# Altium PCB Synth.PcbDoc
Units mm, origin at the board's own origin, x right, y up, seen from the top; angles counter-clockwise.
Board outline 67.94 x 81.91 mm, 2 copper layers (Top Layer, Bottom Layer); 69 components, 40 nets, 189 pads, 106 vias.
Unrouted connection lines stored in the file: 3.
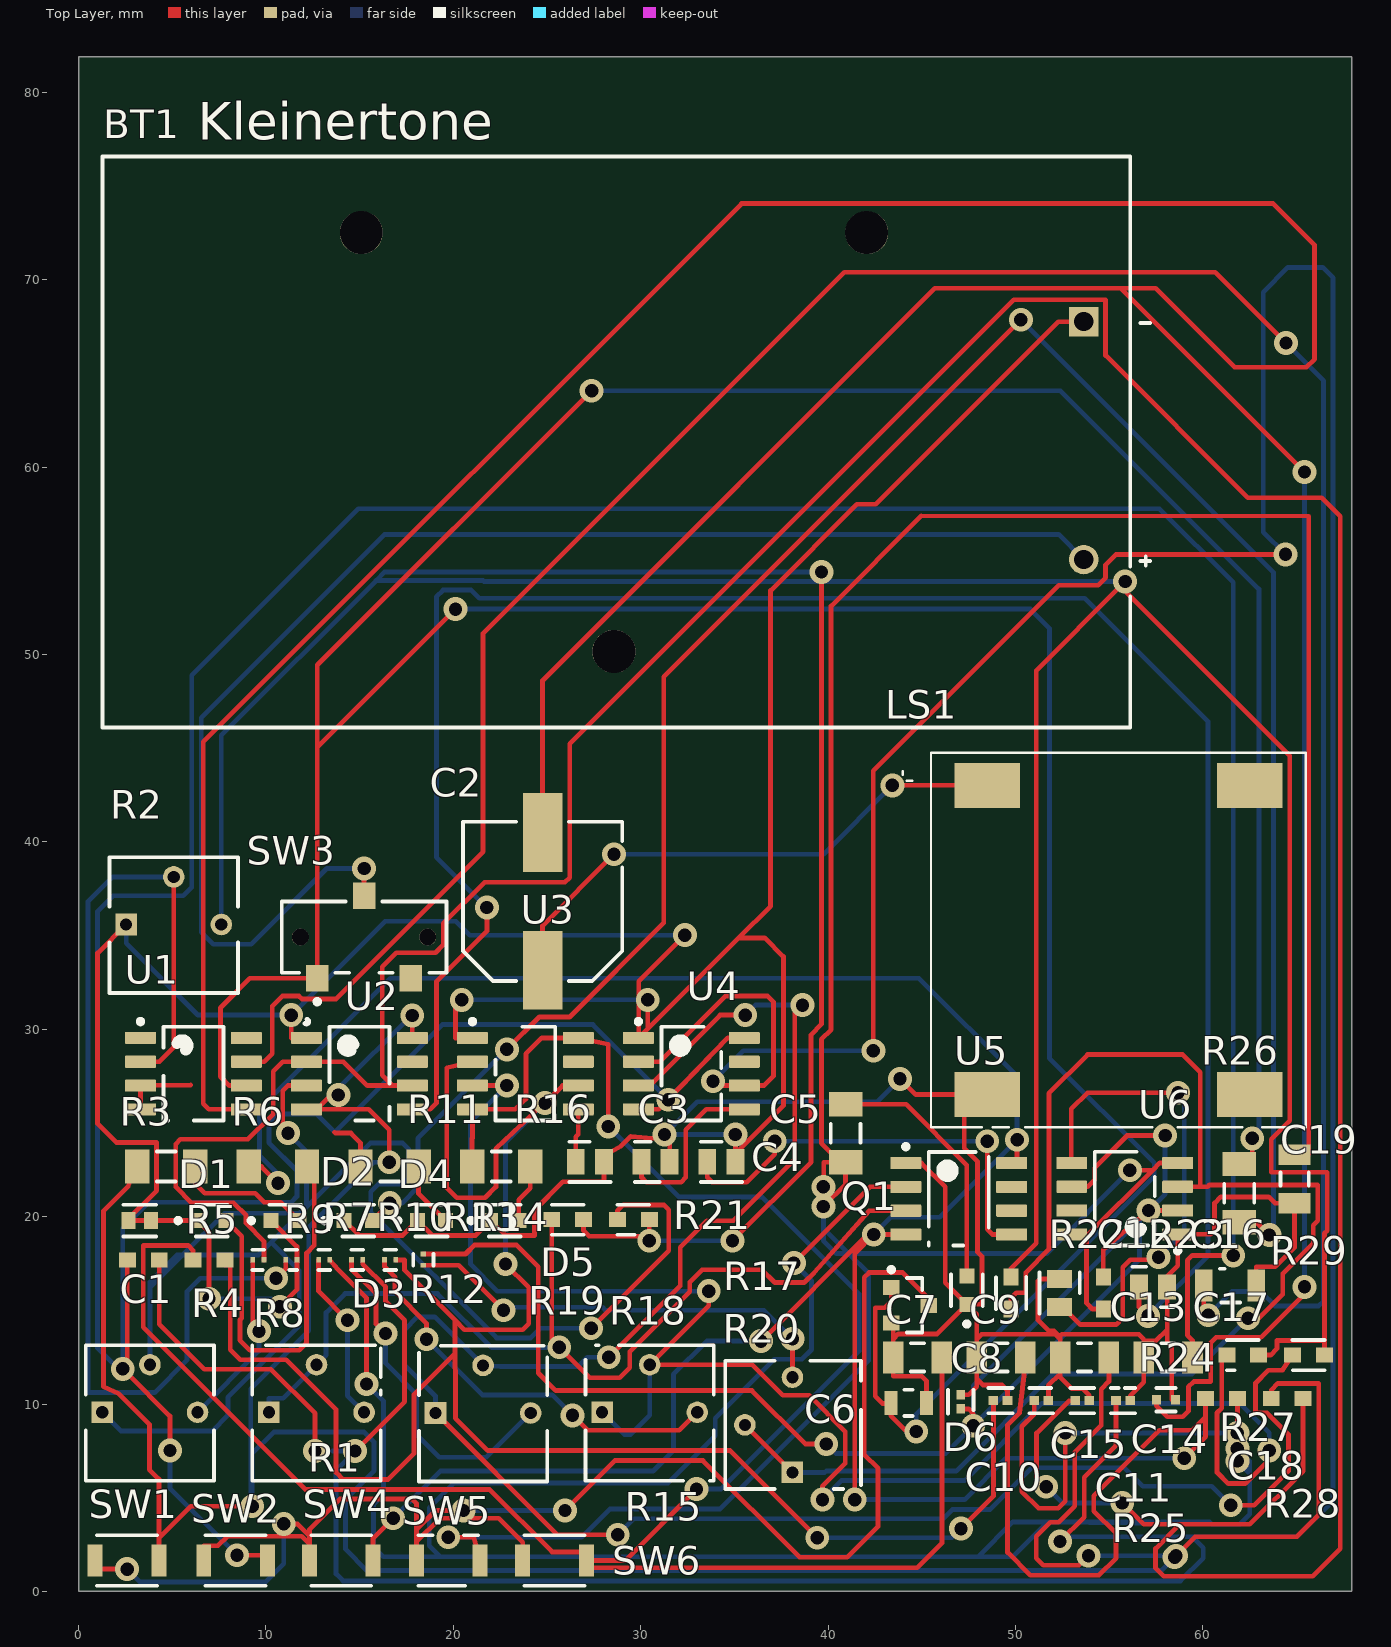
[diagram p0: Top Layer view]
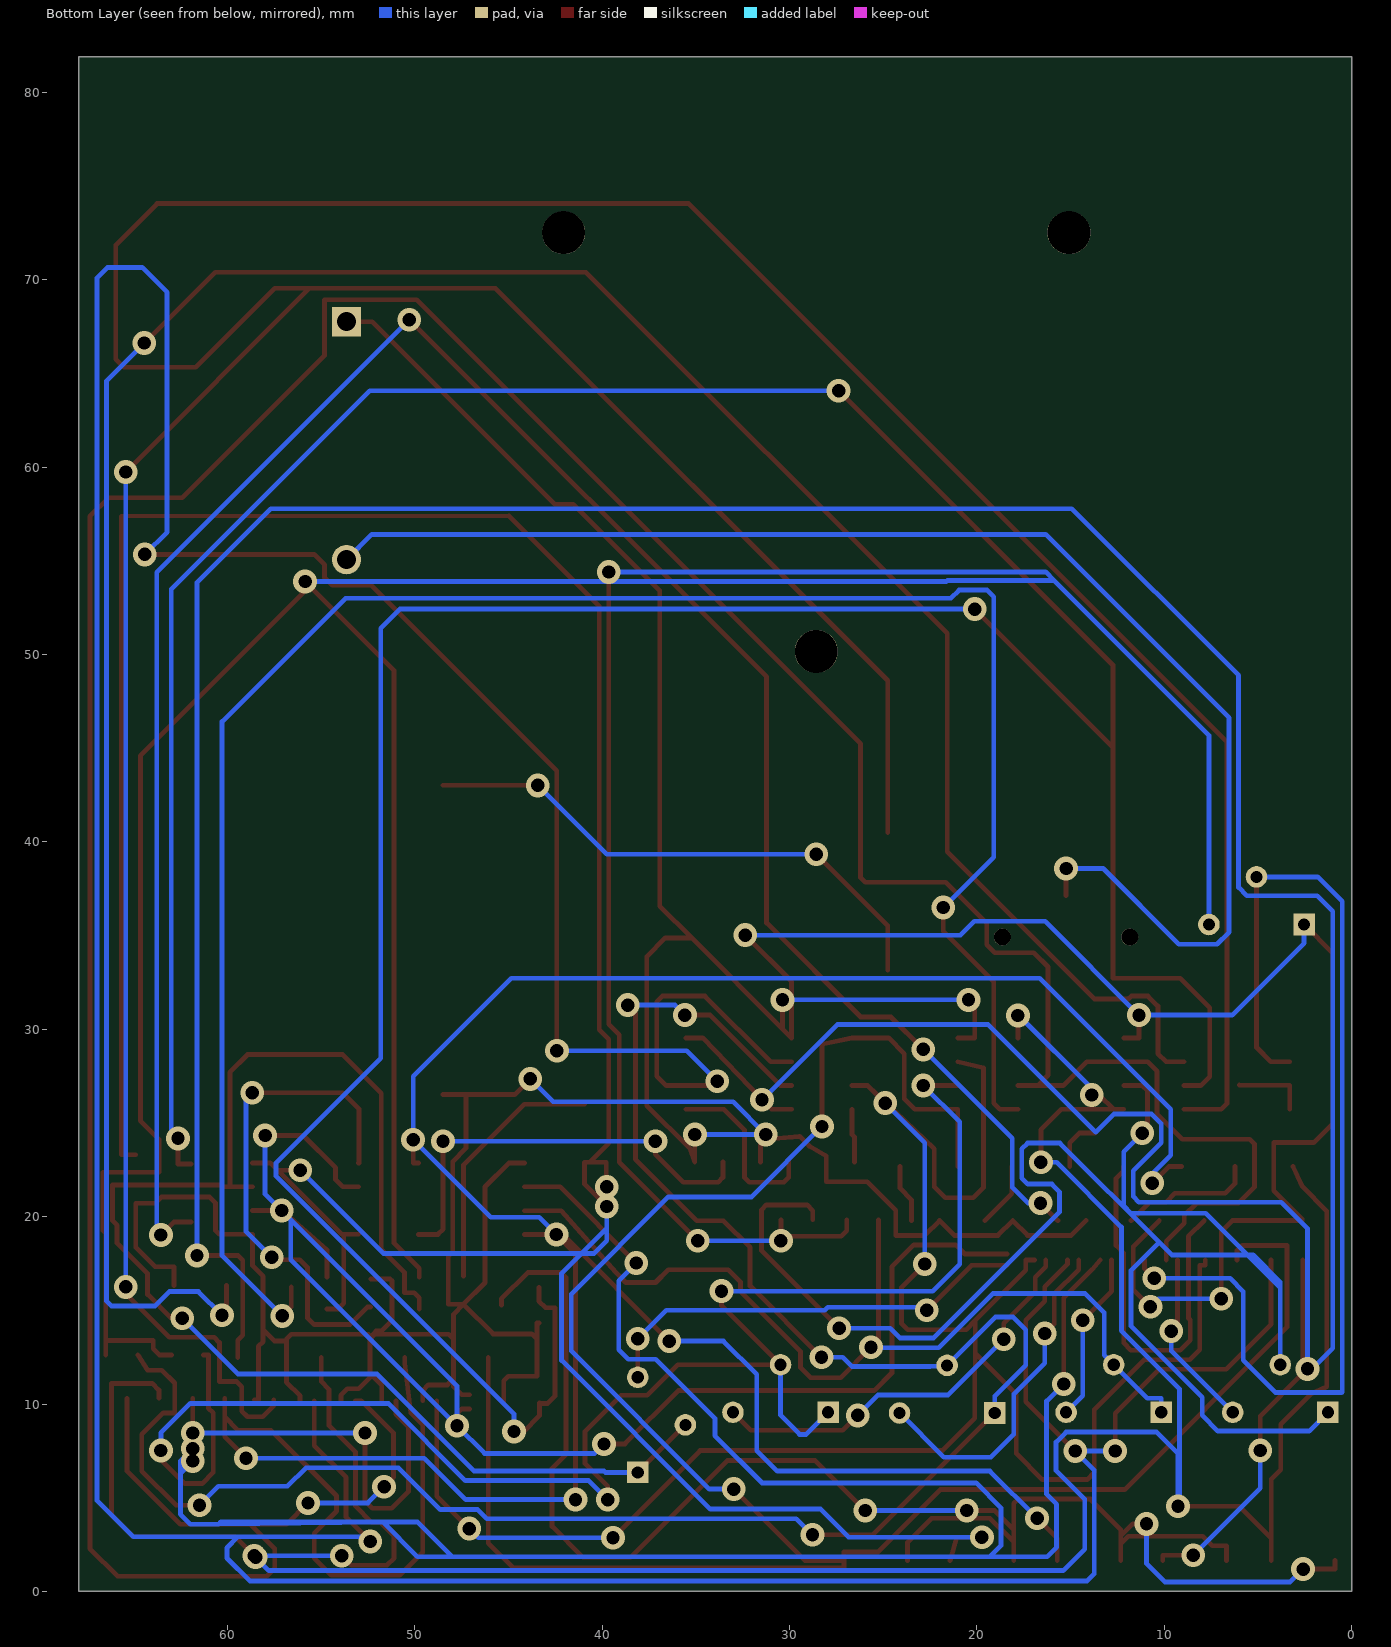
[diagram p1: Bottom Layer view, seen from below]
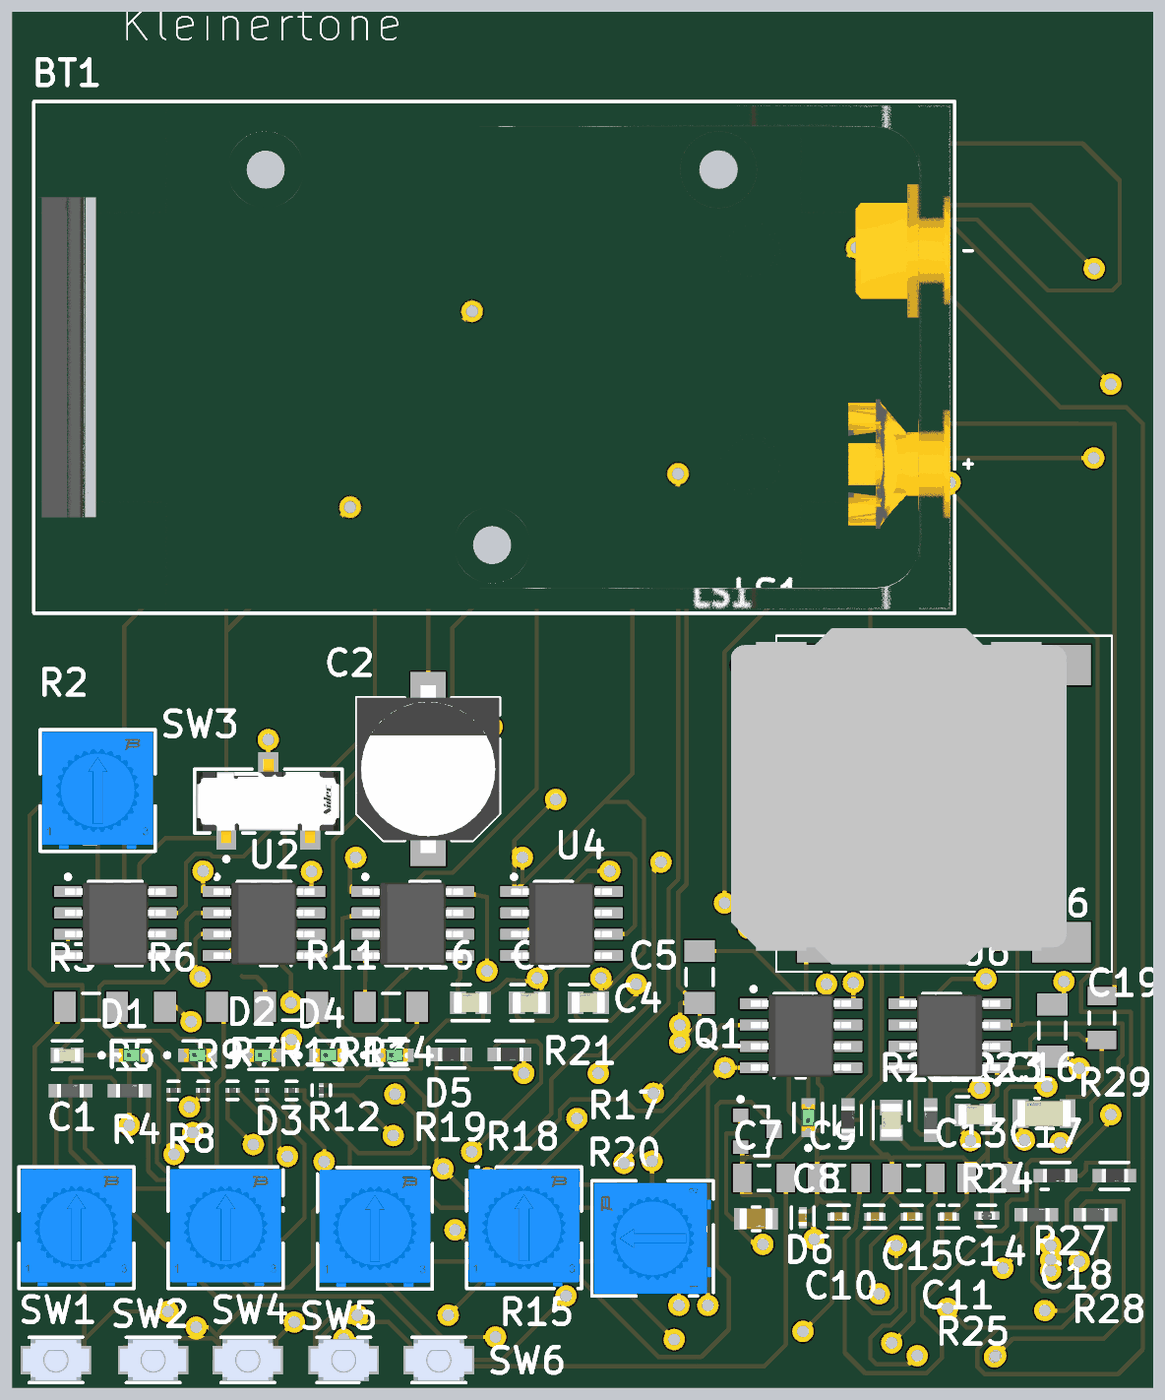
[diagram p2: 3D render of the assembled board from above, using the file's embedded part models]

## Layer stack, top to bottom
Top Solder: solder mask 0.0102, Solder Resist, Dk 3.5
Top Layer: signal copper 0.0356
Dielectric 1: dielectric 0.32, FR-4, Dk 4.8
Bottom Layer: signal copper 0.0356
Bottom Solder: solder mask 0.0102, Solder Resist, Dk 3.5

## Board outline
0,0 67.945,0 67.945,81.915 0,81.915

## Design rules (kind name [scope] priority, off if disabled: settings)
Clearance [All] p1: gap=0.254 ignorepadtopadclearanceinfootprint=FALSE except(0: Arc-Hole Track-Hole SMDPad-Hole THPad-Hole Via-Hole Fill-Hole Poly-Hole Region-Hole Text-Hole)
PolygonConnect [All] p1: connectstyle=Relief reliefconductorwidth=0.254 reliefentries=4 polygonreliefangle="90 Angle" airgapwidth=0.254
RoutingVias [All] p1: holewidth=0.711 width=1.27 viastyle="Through Hole" minholewidth=0.711 minwidth=1.27 maxholewidth=0.711 maxwidth=1.27
SolderMaskExpansion [All] p1: expansion=0.102 istentingtop=FALSE
Width [All] p1: maxlimit=0.254 minlimit=0.254 preferedwidth=0.254
30 further rules are at their usual default settings.

## Classes and differential pairs
channel class 555_Astable: ASG1 ASG2 ASG3 ASG4 ASG5
component class Synth: BT1 C1 C3 C18 D3 LS1 Q1 R5 R10 R24 R26 SW5 U1
component class ASG4: C14 C15 C18 D3 R1 R5 R7 R25 R28 U2
component class ASG2: C5 C9 C11 D1 R8 R18 R24 R25 R26 U5
component class ASG1: C12 C18 C19 D6 R14 R21 R26 R27 U6
component class ASG3: C3 C7 C19 D5 R5 R16 R18 R27 U3
component class ASG5: C5 C15 C17 D4 R5 R12 R16 R25 U4

## Components (designator, comment, footprint, x,y, rotation, side; value= is the part's Value field where it differs from the comment)
BT1 "9V" FP-BH9VPC-MFG 28.702,61.341 r0 top
C1 "47nF" FP-C0603C-CF-MFG 3.256,19.792 r0 top value="47,000 pF" (schematic designator C7)
C2 "220uF" PNSC-EEE-FK1E221P_N 24.765,36.83 r90 top (schematic designator C6)
C3 "10n" FP-C0805C-DN-MFG 27.288,22.925 r0 top value="10,000 pF" (schematic designator C2)
C4 "10n" FP-C0805C-DN-MFG 30.796,22.925 r0 top value="10,000 pF" (schematic designator C2)
C5 "10n" FP-C0805C-DN-MFG 34.304,22.925 r0 top value="10,000 pF" (schematic designator C2)
C6 "22uF" FP-GRM21B-0_15-MFG 44.299,10.058 r0 top (schematic designator C4)
C7 "1 uF" CAPC3216X110X50LL20T25 44.774,12.491 r0 top value=1uF (schematic designator C1)
C8 "4.7uF" FP-CL282-IPC_C 47.082,10.122 r90 top (schematic designator C3)
C9 "1 uF" CAPC3216X110X50LL20T25 49.232,12.491 r0 top value=1uF (schematic designator C1)
C10 "4.7uF" FP-CL282-IPC_C 49.201,10.183 r0 top (schematic designator C3)
C11 "4.7uF" FP-CL282-IPC_C 51.382,10.183 r0 top (schematic designator C3)
C12 "10n" FP-C0805C-DN-MFG 52.355,15.924 r90 top value="10,000 pF" (schematic designator C2)
C13 "1 uF" CAPC3216X110X50LL20T25 53.69,12.491 r0 top value=1uF (schematic designator C1)
C14 "4.7uF" FP-CL282-IPC_C 53.562,10.183 r0 top (schematic designator C3)
C15 "4.7uF" FP-CL282-IPC_C 55.743,10.183 r0 top (schematic designator C3)
C16 "10n" FP-C0805C-DN-MFG 57.346,16.249 r0 top value="10,000 pF" (schematic designator C2)
C17 "1 uF" CAPC3216X110X50LL20T25 58.148,12.491 r0 top value=1uF (schematic designator C1)
C18 "0.1uF" FP-C1206C-EB-MFG 61.454,16.324 r0 top value="0.10 μF" (schematic designator C5)
C19 "1 uF" CAPC3216X110X50LL20T25 64.898,22.012 r90 top value=1uF (schematic designator C1)
D1 "LED GREEN" FP-LTST-C190GKT-MFG 7.114,19.792 r0 top
D2 "LED GREEN" FP-LTST-C190GKT-MFG 11.022,19.792 r0 top (schematic designator D1)
D3 "LED GREEN" FP-LTST-C190GKT-MFG 14.93,19.792 r0 top (schematic designator D2)
D4 "LED GREEN" FP-LTST-C190GKT-MFG 18.838,19.792 r0 top (schematic designator D1)
D5 "LED GREEN" FP-LTST-C190GKT-MFG 22.746,19.792 r0 top (schematic designator D1)
D6 "LED GREEN" FP-LTST-C190GKT-MFG 47.407,16.074 r90 top (schematic designator D1)
LS1 "KAAG20008C-10A" SPKR_KAAG20008C-10A 55.496,34.77 r0 top
Q1 "BSS123LT1G" ONSC-SOT-23-3-318-08_V 44.374,15.274 r0 top
R1 "1000" FP-3362P-1-102TLF-MFG 3.81,9.525 r0 top (schematic designator R5)
R2 "1000" FP-3362P-1-102TLF-MFG 5.08,35.56 r0 top (schematic designator R7)
R3 "220" RESC3216X60X45ML10T20 4.681,22.675 r0 top (schematic designator R2)
R4 "100K" FP-RC0603-0_55-MFG 3.456,17.684 r0 top value=100kR (schematic designator R3)
R5 "100K" FP-RC0603-0_55-MFG 6.964,17.684 r0 top value=100kR (schematic designator R3)
R6 "220" RESC3216X60X45ML10T20 10.639,22.675 r0 top (schematic designator R2)
R7 "100" FP-ERJ1GN-MFG 9.597,17.694 r0 top value=100Ω (schematic designator R4)
R8 "1000" FP-3362P-1-102TLF-MFG 12.7,9.525 r0 top (schematic designator R5)
R9 "100" FP-ERJ1GN-MFG 11.355,17.694 r0 top value=100Ω (schematic designator R8)
R10 "100" FP-ERJ1GN-MFG 13.113,17.694 r0 top value=100Ω (schematic designator R4)
R11 "220" RESC3216X60X45ML10T20 16.597,22.675 r0 top (schematic designator R2)
R12 "100" FP-ERJ1GN-MFG 14.871,17.694 r0 top value=100Ω (schematic designator R4)
R13 "100" FP-ERJ1GN-MFG 16.629,17.694 r0 top value=100Ω (schematic designator R4)
R14 "100" FP-ERJ1GN-MFG 18.402,17.709 r90 top value=100Ω (schematic designator R4)
R15 "1000" FP-3362P-1-102TLF-MFG 21.59,9.49 r0 top (schematic designator R5)
R16 "220" RESC3216X60X45ML10T20 22.555,22.675 r0 top (schematic designator R2)
R17 "10k" FP-RT0603-MFG 26.104,19.842 r0 top value=10KΩ (schematic designator R1)
R18 "1000" FP-3362P-1-102TLF-MFG 30.48,9.525 r0 top (schematic designator R5)
R19 "10k" FP-RT0603-MFG 29.612,19.842 r0 top value=10KΩ (schematic designator R1)
R20 "1000" FP-3362P-1-102TLF-MFG 38.135,8.89 r90 top (schematic designator R5)
R21 "220" RESC3216X60X45ML10T20 40.937,24.451 r90 top (schematic designator R2)
R22 "10k" FP-RT0603-MFG 49.765,15.924 r90 top value=10KΩ (schematic designator R1)
R23 "100K" FP-RC0603-0_55-MFG 54.688,15.924 r90 top value=100kR (schematic designator R3)
R24 "10" FP-ERJ2RK-MFG 58.037,10.233 r0 top value=10Ω (schematic designator R9)
R25 "100K" FP-RC0603-0_55-MFG 60.995,10.308 r0 top value=100kR (schematic designator R3)
R26 "200" RESC3216X60X45ML10T20 61.94,21.262 r90 top (schematic designator R6)
R27 "10k" FP-RT0603-MFG 62.131,12.616 r0 top value=10KΩ (schematic designator R1)
R28 "100K" FP-RC0603-0_55-MFG 64.503,10.308 r0 top value=100kR (schematic designator R3)
R29 "10k" FP-RT0603-MFG 65.639,12.616 r0 top value=10KΩ (schematic designator R1)
SW1 "B3U-1000P" FP-B3U-1000P-MFG 2.589,1.651 r0 top (schematic designator SW6)
SW2 "B3U-1000P" FP-B3U-1000P-MFG 8.382,1.651 r0 top (schematic designator SW4)
SW3 "CL-SB-12B-02T" FP-CL-SB-12B-02T-MFG 15.24,34.925 r0 top (schematic designator SW5)
SW4 "B3U-1000P" FP-B3U-1000P-MFG 14.019,1.651 r0 top (schematic designator SW3)
SW5 "B3U-1000P" FP-B3U-1000P-MFG 19.734,1.651 r0 top (schematic designator SW2)
SW6 "B3U-1000P" FP-B3U-1000P-MFG 25.4,1.651 r0 top (schematic designator SW1)
U1 "LM386M-1" D0008A_M 6.131,27.633 r0 top (schematic designator U2)
U2 "LM555CM/NOPB" D0008A_M 14.989,27.633 r0 top (schematic designator U1)
U3 "LM555CM/NOPB" D0008A_M 23.847,27.633 r0 top (schematic designator U1)
U4 "LM555CM/NOPB" D0008A_M 32.705,27.633 r0 top (schematic designator U1)
U5 "LM555CM/NOPB" D0008A_M 46.974,20.957 r0 top (schematic designator U1)
U6 "LM555CM/NOPB" D0008A_M 55.832,20.962 r180 top (schematic designator U1)

## Footprints (in the part's own frame and the unit in brackets; to place one, negate y for a bottom-side part, rotate by r counter-clockwise, add the part's x,y. Pads: shape width x height; smd on the part's side, far side on the other; paste and mask are expansions set on the pad)
CAPC3216X110X50LL20T25 [mm] "Chip Capacitor, 2-Leads, Body 3.20x1.60mm, IPC High Density"
  rect 1.1x1.7 smd: 1(-1.3,0) 2(1.3,0)
  silkscreen extent -0.35,-0.75 0.35,0.75, body extent -1.7,-0.9 1.7,0.9, height 1.1
D0008A_M [mm] "SOIC, 8-Leads, Body 5x4mm, Pitch 1.27mm, IPC Low Density"
  rrect15% 1.65x0.65 smd: 1(-2.825,1.905) 2(-2.825,0.635) 3(-2.825,-0.635) 4(-2.825,-1.905) 5(2.825,-1.905) 6(2.825,-0.635) 7(2.825,0.635) 8(2.825,1.905)
  silkscreen extent -2.95,-2.5 1.6,2.9, body extent -3,-2.45 3,2.45, height 1.63
FP-3362P-1-102TLF-MFG [mm]
  rect 1.15x1.15 hole 0.65 paste-1000 mask+0: 1(-2.54,0.035)
  round 1.15 hole 0.65 paste-1000 mask+0: 2(0,2.575) 3(2.54,0.035)
  silkscreen extent -3.42,-3.62 3.42,3.62, body extent -3.52,-3.72 3.52,3.72, height 0.25
FP-B3U-1000P-MFG [mm]
  rect 0.8x1.7 smd paste+0 mask+0: 1(-1.7,0) 2(1.7,0)
  silkscreen extent -1.6,-1.35 1.6,1.35, body extent -2.2,-1.45 2.2,1.45, height 0.25
FP-BH9VPC-MFG [mil]
  rect 61.65x61.65 hole 40 paste-39370.1 mask+0: 1(982,253)
  round 61.65 hole 40 paste-39370.1 mask+0: 2(982,-247)
  round 90.16 hole 90.16 unplated paste-39370.1 mask+0: ""(-536,440) ""(-5,-440) ""(526,440)
  silkscreen extent -1080,-600 1121,600, body extent -1084,-604 1084,604, height 10
FP-C0603C-CF-MFG [mm]
  rect 0.75x0.9 smd paste+0 mask+0: 1(-0.6,0) 2(0.6,0)
  silkscreen extent -0.88,-0.85 0.88,0.85, body extent -1.2,-0.6 1.2,0.6, height 0.25
FP-C0805C-DN-MFG [mm]
  rect 0.95x1.35 smd paste+0 mask+0: 1(-0.75,0) 2(0.75,0)
  silkscreen extent -1.1,-1.08 1.1,1.08, body extent -1.4,-0.85 1.4,0.85, height 0.25
FP-C1206C-EB-MFG [mm]
  rect 0.95x1.7 smd paste+0 mask+0: 1(-1.4,0) 2(1.4,0)
  silkscreen extent -0.55,-0.9 0.55,0.9, body extent -2,-1 2,1, height 0.25
FP-CL282-IPC_C [mm]
  rect 0.515x0.472 smd paste+0 mask+0: 1(-0.379,0) 2(0.379,0)
  silkscreen extent -0.64,-0.68 0.64,0.67, body extent -0.74,-0.38 0.74,0.38, height 0.25
FP-CL-SB-12B-02T-MFG [mm]
  rect 1.2x1.4 smd paste+0 mask+0: 1(-2.5,-2.2) 2(0,2.2) 3(2.5,-2.2)
  round 0.9 hole 0.9 unplated paste-1000 mask+0: ""(-3.4,0) ""(3.4,0)
  silkscreen extent -4.4,-3.57 4.4,1.9, body extent -4.5,-3 4.5,3, height 0.25
FP-ERJ1GN-MFG [mm]
  rect 0.25x0.3 smd paste+0 mask+0: 1(-0.3,0) 2(0.3,0)
  silkscreen extent -0.31,-0.54 0.31,0.54, body extent -0.53,-0.27 0.53,0.27, height 0.25
FP-ERJ2RK-MFG [mm]
  rect 0.475x0.5 smd paste+0 mask+0: 1(-0.513,0) 2(0.513,0)
  silkscreen extent -0.52,-0.62 0.53,0.63, body extent -0.85,-0.38 0.85,0.38, height 0.25
FP-GRM21B-0_15-MFG [mm]
  rect 0.7x1.3 smd paste+0 mask+0: 1(-0.95,0) 2(0.95,0)
  silkscreen extent -0.22,-0.7 0.23,0.7, body extent -1.4,-0.8 1.4,0.8, height 0.25
FP-LTST-C190GKT-MFG [mm]
  rect 0.8x0.8 smd paste+0 mask+0: 1(-0.75,0) 2(0.75,0)
  silkscreen extent -1.92,-0.85 0.85,0.85, body extent -1.25,-0.55 1.25,0.55, height 0.25
FP-RC0603-0_55-MFG [mm]
  rect 0.9x0.8 smd paste+0 mask+0: 1(-0.85,0) 2(0.85,0)
  body extent -1.4,-0.55 1.4,0.55, height 0.25
FP-RT0603-MFG [mm]
  rect 0.9x0.8 smd paste+0 mask+0: 1(-0.85,0) 2(0.85,0)
  silkscreen extent -0.85,-0.81 0.86,0.8, body extent -1.4,-0.55 1.4,0.55, height 0.25
ONSC-SOT-23-3-318-08_V [mm] "SOT23, 3-Leads, Body 2.92x1.3mm, Pitch 0.95mm"
  rect 0.9x0.8 smd: 1(-1,0.95) 2(-1,-0.95) 3(1,0)
  silkscreen extent -1.12,-1.46 0.65,2.02, body extent -0.65,-1.46 0.65,1.46, height 1.11
PNSC-EEE-FK1E221P_N [mm] "CAPAE, 2-Leads, Body 8.5x8.5mm, IPC Medium Density"
  rect 4.2x2.1 smd: 1(-3.675,0) 2(3.675,0)
  silkscreen extent -4.25,-4.25 4.25,4.25, body extent -5,-4.25 5,4.25, height 10.5
RESC3216X60X45ML10T20 [mm] "Chip Resistor, 2-Leads, Body 3.20x1.60mm, IPC Low Density"
  rect 1.3x1.8 smd: 1(-1.55,0) 2(1.55,0)
  silkscreen extent -0.5,-0.8 0.5,0.8, body extent -1.65,-0.85 1.65,0.85, height 0.6
SPKR_KAAG20008C-10A [mm]
  rect 3.5x2.4 smd: N(-7,-8.25) P(-7,8.25) S1(7,8.25) S2(7,-8.25)
  silkscreen extent -11.5,-10 10,10, body extent -12.7,-9.56 7.3,10.44, height 4.3

## Part data
BT1: library part CMP-136216-000001-1, "BATTERY HOLDER 9V PC PIN BH9VPC", Manufacturer="Memory Protection Devices", Manufacturer Part Number=BH9VPC, Package=0, Automotive=No, Category=Batt, ComponentLink2Description=Datasheet, ComponentLink2URL=http://www.memoryprotectiondevices.com/datasheets/BH9VPC-datasheet.pdf, Conn Orientation=Vertical, Contact Material=Nickel, Device Class L1=Connectors, Device Class L2=unset, Device Class L3=unset, Digikey Description="BATTERY HOLDER 9V PC PIN", Height=21.12mm, Is Female=yes, Lead Free=Yes, Number Of Contacts=2, Octopart=https://octopart.com/bh9vpc-memory+protection+devices-22788154, RoHS=TRUE, Voltage Rating=9V
C1: library part CMP-2006-03232-2, "CAP CER 0.047UF 50V 10% X7R 0603 C0603C473K5RACTU", Capacitance="47,000 pF", Manufacturer=KEMET, Manufacturer Part Number=C0603C473K5RACTU, Package=C0603C-CF, Temperature="-55°C to +125°C", Temperature Characteristic=X7R, Temperature Coefficient=30ppm/°C, Temperature Range High=+125°C, Temperature Range Low=-55°C, Tolerance=0.1, Voltage Rating="50 V", Automotive=Yes, Automotive Grade="Grade 1", Category=Cap, ComponentLink2Description=Datasheet, ComponentLink2URL=https://api.kemet.com/component-edge/download/datasheet/C0603C100J5GACAUTO.pdf, Device Class L1="Passive Components", Device Class L2=Capacitors, Device Class L3="Ceramic Capacitors", Digikey Description="CAP CER 0.047UF 50V 10% X7R 0603", Height=0.87mm, Lead Free=Yes, Material=Ceramic, Mouser Description="Multilayer Ceramic Capacitors MLCC - SMD/SMT 50volts 47000pF X7R 10%", Octopart=https://octopart.com/c0603c473k5ractu-kemet-9138594, RoHS=TRUE
C2: library part CMP-1665-00017-3, "Aluminum Electrolytic Capacitor, 220 uF, +/- 20%, 25 V, -55 to 105 degC, 2-Pin CAPAE, RoHS, Tape and Reel EEE-FK1E221P", Manufacturer=Panasonic, Max Operating Temperature="105 degC", Min Operating Temperature="-55 degC", Package Quantity=500, Voltage Rating="25 V", ComponentLink1Description="Manufacturer URL", ComponentLink1URL=http://www.panasonic.com/, ComponentLink2Description=Datasheet, ComponentLink2URL=http://industrial.panasonic.com/cdbs/www-data/pdf/RDE0000/ABA0000C1181.pdf, DatasheetVersion=03/2016, Height="10.2 mm", Lead Pitch="3.1 mm", Length="10.2 mm", Mount="Surface Mount", Mounting Technology="Surface Mount", PackageDescription="2-Pin Electrolytic Aluminum Capacitor, Body 8.3 x 8.3 mm", PackageReference=EEE-FK1E221P, Packaging="Tape and Reel", Pins=2, REACH SVHC="No SVHC", RoHSCompliant=true
C3 C4 C5 C12 C16: library part CMP-2007-00259-2, "CAP CER 10000PF 200V X7R 0805 C0805C103K2RACTU", Capacitance="10,000 pF", Manufacturer=KEMET, Manufacturer Part Number=C0805C103K2RACTU, Package=C0805C-DN, Temperature="-55°C to +125°C", Temperature Characteristic=X7R, Temperature Coefficient=30ppm/°C, Temperature Range High=+125°C, Temperature Range Low=-55°C, Tolerance=0.1, Voltage Rating="200 V", Automotive=No, Category=Cap, ComponentLink2Description=Datasheet, ComponentLink2URL=https://content.kemet.com/datasheets/KEM_C1003_C0G_SMD.pdf, Device Class L1="Passive Components", Device Class L2=Capacitors, Device Class L3="Ceramic Capacitors", Digikey Description="CAP CER 10000PF 200V X7R 0805", Height=0.88mm, Ipc Land Pattern Name=CAPC200125X78, Lead Free=Yes, Material=Ceramic, Mouser Description="KEMET - C0805C103K2RACTU - CAP, MLCC, X7R, 10NF, 200V, 0805", Octopart=https://octopart.com/c0805c103k2ractu-kemet-9138347, RoHS=TRUE
C6: library part CMP-2007-03385-2, "Chip Multilayer Ceramic Capacitors for General Purpose, 0805, 22uF, X5R, 15%, 20%, 6.3V GRM21BR60J226ME39L", Case Code (Imperial)=0805, Case Code (Metric)=2012, Dielectric=X5R, Max Operating Temperature=85°C, Min Operating Temperature=-55°C, Package Quantity=1, Tolerance=20%, Voltage=6.3V, Capacitance=22uF, Case/Package=0805, Depth=1.25mm, Height=1.25mm, Lead Free="Lead Free", Length=2mm, Material=Ceramic, Mount="Surface Mount", Packaging="Tape and Reel", Radiation Hardening=No, REACH SVHC="No SVHC", Termination=SMD/SMT, Thickness=0.053inch, Voltage Rating=6.3V, Voltage Rating (DC)=6.3V, Width=0.049inch
C7 C9 C13 C17 C19: library part CMP-2000-06011-1, "Chip Capacitor, 1 uF, +/- 10%, 50 V, -55 to 125 degC, 1206 (3216 Metric), RoHS, Tape and Reel", Capacitance=1uF, Capacitance - nF=1000nF, Case Code - in=1206, Case Code - mm=3216, Case Height=1mm, Case Length=3.2mm, Case Width=1.6mm, Dielectric=X7R, Manufacturer=Kemet, Maximum Operating Temperature=+125C, Minimum Operating Temperature=-55C, Operating Temperature Range=-55Cto+125C, Package / Case=1206(3216metric), Package Description="2-Pin Surface Mount Device, Body 3.2 x 1.6 mm", Temperature Coefficient / Code=+/-15%, Tolerance=10%, Voltage Rating=50V, Brand=Kemet, Class=Class1, Datasheet URL=http://www.kemet.com/docfinder?Partnumber=C1206C105K5RACTU, Datasheet Version=02/2016, Dimensions=1.6mmWx3.2mmLx1mmH, Factory Pack Quantity=2500, Manufacturer URL=http://www.kemet.com/, Mounting Technology=SurfaceMount, Package Reference=1206, Packaging=Reel, Product=GeneralTypeMLCCs, Product Category=MultilayerCeramicCapacitorsMLCC-SMD/SMT, RoHS=Details, Series=C1206C, Termination Style=SMD/SMT, Type=SMDMLCCX7R6.3-250VDCCommericalGrade, Voltage Rating DC=50V
C8 C10 C11 C14 C15: library part CMP-13271-000548-1, "Cap Ceramic 4.7uF 10V X5R ±20% SMD 0402 +85°C Paper T/R 4.7uF CL05A475MP5NRNC", Case Code (Imperial)=0402, Case Code (Metric)=1005, Dielectric=X5R, Max Operating Temperature=85°C, Min Operating Temperature=-55°C, Package Quantity=10000, Tolerance=20%, Voltage Rating=10V, Capacitance=4.7uF, Case/Package=0402, Lead Free="Lead Free", Length=0.039inch, Mount="Surface Mount", Packaging="Tape and Reel", Thickness=0.022inch, Width=0.02inch
C18: library part CMP-1037-04222-2, "CAP CER 0.1UF 200V 10% X7R 1206 C1206C104K2RACTU", Capacitance="0.10 μF", Manufacturer=KEMET, Manufacturer Part Number=C1206C104K2RACTU, Package=C1206C-EB, Temperature="-55°C to +150°C", Temperature Characteristic=X7R, Temperature Coefficient=15%, Temperature Range High=+150°C, Temperature Range Low=-55°C, Tolerance=0.1, Voltage Rating="200 V", Automotive=Yes, Automotive Grade="Grade 0", Category=Cap, ComponentLink2Description=Datasheet, ComponentLink2URL=https://content.kemet.com/datasheets/KEM_C1007_X8R_ULTRA_150C_SMD.pdf, Device Class L1="Passive Components", Device Class L2=Capacitors, Device Class L3="Ceramic Capacitors", Digikey Description="CAP CER 0.1UF 200V 10% X7R 1206", Height=0.88mm, Ipc Land Pattern Name=CAPC320160X78, Lead Free=Yes, Material=Ceramic, Mouser Description="Multilayer Ceramic Capacitors MLCC - SMD/SMT 200volts 0.1uF X7R 10%", Octopart=https://octopart.com/c1206c104k2ractu-kemet-9138344, RoHS=TRUE
D1 D2 D3 D4 D5 D6: library part CMP-22017-000005-2, "LED GREEN CLEAR CHIP SMDLTST-C190GKT", Case Code (Imperial)=0603, Case Code (Metric)=1608, Color=Green, Forward Current=30mA, Forward Voltage=2.1V, Lens Color=Colorless, Max Operating Temperature=85°C, Min Operating Temperature=-55°C, Package Quantity=1, Power Dissipation=100mW, Reverse Voltage=5V, Test Current=10mA, Voltage=2V, Case/Package=0603, Depth=0.8mm, Dominant Wavelength=569nm, Height=0.8mm, Illumination Color=Green, Lead Free="Lead Free", Length=1.6mm, Lens Style=Clear, Lens Transparency=Clear, Luminous Intensity=6mcd, Mount="Surface Mount", Number of Elements=1, Number of LEDs=1, Number of Pins=2, Packaging="Tape and Reel", Power Rating=100mW, Radiation Hardening=No, Viewing Angle=130°, Wavelength=565nm, Width=0.8mm
LS1: "High SPL Micro Speaker, 20mm, 1W, 88dB, 1400Hz", Package=None, Availability="In Stock", Check_prices=https://www.snapeda.com/parts/KAAG20008C-10A/Kingstate/view-part/?ref=eda, MF=Kingstate, MP=KAAG20008C-10A, Price=None, SnapEDA_Link=https://www.snapeda.com/parts/KAAG20008C-10A/Kingstate/view-part/?ref=snap
Q1: library part CMP-1058-00788-1, "Power MOSFET, 170 mA, 100 V, N-Channel, 3-Pin SOT-23, Pb-Free, Tape and Reel", Manufacturer="On Semiconductor", Package Type=SOT-23-3, Channel Polarity="N Channel", Ciss Typ (pF)=20, ComponentLink1Description="Manufacturer URL", ComponentLink1URL=http://www.onsemi.com/, ComponentLink2Description=Datasheet, ComponentLink2URL=http://www.onsemi.com/pub_link/Collateral/BSS123LT1-D.PDF, ComponentLink3Description="Package Specification", ComponentLink3URL=http://www.onsemi.cn/pub_link/Collateral/318-08.PDF, Configuration=Single, Coss Typ (pF)=9, Crss Typ (pF)=4, DatasheetVersion="Rev. 8", ID Max (A)=0.17, Mounting Technology="Surface Mount", PackageDescription="3-Pin Small Outline Transistor, Body 2.92 x 1.3 mm, Pitch 0.95 mm", PackageReference=SOT-23-3-318-08, PackageVersion="Rev. AP, 11/2009", Packing="Tape and Reel", PartNumber=BSS123LT1G, PD Max (W)=0.225, RoHS=Pb-Free, V(BR)DSS Min (V)=100, VGS Max (V)=20, VGS(th) Max (V)=2.6
R1 R2 R8 R15 R18 R20: library part CMP-07234-000030-1, "TRIMMER 1K OHM 0.5W PC PIN TOP 3362P-1-102TLF", Max Operating Temperature=125°C, Max Power Dissipation=500mW, Min Operating Temperature=-55°C, Package Quantity=200, Resistance=1kR, Resistor Type=Cermet, Temperature Coefficient=100ppm/°C, Tolerance=10%, Contact Plating=Tin, Depth=7.04mm, Height=0.185inch, Length=6.71mm, Military Standard=Not, Mount="Through Hole", Number of Turns=1, Packaging=Rail/Tube, Power Rating=500mW, RoHS Compliant=Yes, Series="Trimpot® 3362 - Sealed", Technology=CERMET, Termination=Pin, Weight=0.02oz, Width=4.7mm
R3 R6 R11 R16 R21 R26: library part CMP-2003-01956-1, "CRCW1206220RFKEA", Manufacturer="Vishay Dale", Part Number=CRCW1206220RFKEA
R4 R5 R23 R25 R28: library part CMP-2100-03662-2, "RES SMD 100K OHM 1% 1/10W 0603 RC0603FR-07100KL", Case Code (Imperial)=0603, Case Code (Metric)=1608, Max Operating Temperature=155°C, Max Power Dissipation=100mW, Min Operating Temperature=-55°C, Resistance=100kR, Resistance Tolerance=1%, Resistor Type="Thick Film", Temperature Coefficient=100ppm/°C, Voltage Rating=50V, Working Voltage=75V, Case/Package=0603, Construction=Rectangular, Depth=0.8mm, Features="Moisture Resistant", Height=0.45mm, Lead Free="Lead Free", Length=1.6mm, Military Standard=Not, Number of Pins=2, Number of Terminations=2, Packaging="Tape and Reel", Power Rating=100mW, REACH SVHC="No SVHC", RoHS Compliant=Yes, Series=RC, Technology="THICK FILM", Termination=SMD/SMT, Tolerance=1%, Voltage Rating (DC)=50V, Width=0.8mm
R7 R9 R10 R12 R13 R14: library part CMP-2004-03443-2, "RES SMD 100 OHM 1% 1/20W 0201ERJ-1GNF1000C", Manufacturer="Panasonic Electronic Components", Manufacturer Part Number=ERJ-1GNF1000C, Package=ERJ1GN, Power Rating=0.05W, Resistance=100Ω, Temperature="-55°C to +125°C", Temperature Coefficient=200ppm/°C, Temperature Range High=+125°C, Temperature Range Low=-55°C, Tolerance=1%, Voltage Rating=25V, Automotive=Yes, Automotive Grade="Grade 1", Category=Res, ComponentLink2Description=Datasheet, ComponentLink2URL=https://industrial.panasonic.com/cdbs/www-data/pdf/RDA0000/AOA0000C304.pdf, Composition="Thick Film", Device Class L1="Passive Components", Device Class L2=Resistors, Device Class L3="Chip SMD Resistors", Digikey Description="RES SMD 100 OHM 1% 1/20W 0201", Footprint Url=https://industrial.panasonic.com/cdbs/www-data/pdf/RDA0000/DMA0000COL17.pdf, Height=0.26mm, Lead Free=Yes, Mouser Description="Thick Film Resistors 0201 100ohm 1% HalogenFree AEC-Q200", Octopart=https://octopart.com/erj-1gnf1000c-panasonic-55419695, RoHS=TRUE, Series=ERJ
R17 R19 R22 R27 R29: library part CMP-03412-005349-1, "RES SMD 10K OHM 1% 1/10W 0603 RT0603FRE0710KL", Manufacturer=Yageo, Manufacturer Part Number=RT0603FRE0710KL, Package=RT0603, Power Rating=0.1W, Resistance=10KΩ, Temperature="-55°C to +155°C", Temperature Coefficient="50 ppm/°C", Temperature Range High=+155°C, Temperature Range Low=-55°C, Tolerance=0.01, Voltage Rating=75V, Automotive=No, Category=Res, ComponentLink2Description=Datasheet, ComponentLink2URL=http://www.yageo.com/documents/recent/PYu-RT_1-to-0.01_RoHS_L_9.pdf, Composition="Thin Film", Device Class L1="Passive Components", Device Class L2=Resistors, Device Class L3="Chip SMD Resistors", Digikey Description="RES SMD 10K OHM 1% 1/10W 0603", Footprint Url=http://www.yageo.com/exep/pages/download/literatures/PYu-R_Mount_10.pdf, Height=0.55mm, Ipc Land Pattern Name=RESC16080X45, Lead Free=Yes, Mouser Description="Thin Film Resistors - SMD 10K ohm 1% 1/10W", Octopart=https://octopart.com/rt0603fre0710kl-yageo-40009243, RoHS=TRUE, Series=RT
R24: library part CMP-2002-00622-4, "RES SMD 10 OHM 1% 1/10W 0402 ERJ-2RKF10R0X", Manufacturer=Panasonic, Manufacturer Part Number=ERJ-2RKF10R0X, Package=ERJ2RK, Power Rating=0.1W, Resistance=10Ω, Temperature="-55°C to +155°C", Temperature Coefficient=100ppm/°C, Temperature Range High=+155°C, Temperature Range Low=-55°C, Tolerance=1%, Voltage Rating=50V, Automotive=Yes, Automotive Grade="Grade 0", Category=Res, ComponentLink2Description=Datasheet, ComponentLink2URL=https://industrial.panasonic.com/cdbs/www-data/pdf/RDA0000/AOA0000C304.pdf, Composition="Thick Film", Device Class L1="Passive Components", Device Class L2=Resistors, Device Class L3="Chip SMD Resistors", Digikey Description="RES SMD 10 OHM 1% 1/10W 0402", Footprint Url=https://industrial.panasonic.com/cdbs/www-data/pdf/RDA0000/DMA0000COL17.pdf, Height=0.4mm, Lead Free=Yes, Mouser Description="Thick Film Resistors - SMD 0402 10.0ohms 1% Tol AEC-Q200", Octopart=https://octopart.com/erj-2rkf10r0x-panasonic-55404982, RoHS=TRUE, Series=ERJ
SW1 SW2 SW4 SW5 SW6: library part CMP-2100-03586-2, "SWITCH TACTILE SPST-NO 0.05A 12V", Contact Current Rating=50mA, Contact Resistance=100mR, Insulation Resistance=100MR, Max Operating Temperature=70°C, Max Voltage Rating (DC)=12V, Min Operating Temperature=-25°C, Operating Force=1.5N, Package Quantity=1, Ratings="Dust Proof", Actuator Length=0.4mm, Actuator Type=Standard, Contact Material=Silver, Current Rating=50mA, Depth=2.5mm, Electrical Life=200000Cycles, Height=1.2mm, Illumination Type=Non-Illuminated, Lead Free="Lead Free", Length=4mm, Max Current Rating=50mA, Mechanical Life=200000Cycles, Mount="Surface Mount", Orientation=Straight, Packaging="Tape and Reel", Switch Function=Off-Mom, Switch Travel=0.15mm, Termination=SMD/SMT, Throw Configuration=SPST, Voltage Rating (DC)=12V, Weight=0.000776oz, Width=3mm
SW3: library part CMP-71745-000009-1, "SWITCH SLIDE SPDT 200MA 12V", Current Rating=200mA, Max Operating Temperature=85°C, Min Operating Temperature=-40°C, Operating Force=153gf, Voltage Rating (DC)=12V, Actuator Length=2mm, Actuator Material=Nylon, Actuator Type=Standard, Contact Material=Copper, Contact Plating=Gold, Contact Style=Non-Shorting, Electrical Life=10000Cycles, Mount="Surface Mount", Packaging="Cut Tape", RoHS Compliant=Yes, Series=CL-SB, Switch Function=On-On, Switch Travel=2mm, Termination="Gull Wing", Throw Configuration=SPDT
U1: library part CMP-0057-00421-4, "Low Voltage Audio Power Amplifier, 8-pin Narrow SOIC", Manufacturer="Texas Instruments", PackageTopMarking=NSZXTT*LM386*M-1, PowerWise=N, Code_IPC=SOIC127P600-8, Code_JEDEC=MS-012-AA, ComponentLink1Description="Datasheet URL", ComponentLink1URL=http://www.ti.com/general/docs/lit/getliterature.tsp?genericPartNumber=LM386&fileType=pdf, CompType="Audio IC", PackageDescription="SOIC Narrow, 4.9 x 3.9 x 1.45mm, 8 Lead, 1.27mm Pitch", PackageReference=D0008A, PinCount=8, RoHS=N
U2 U3 U4 U5 U6: library part CMP-0056-00105-3, "Timer, 8-pin Narrow SOIC, Pb-Free", Manufacturer="Texas Instruments", PackageTopMarking=NSZXTT*LM*555CM, PowerWise=N, Code_IPC=SOIC127P600-8, Code_JEDEC=MS-012-AA, ComponentLink1Description="Datasheet URL", ComponentLink1URL=http://www.ti.com/general/docs/lit/getliterature.tsp?genericPartNumber=LM555&fileType=pdf, CompType="Analog IC", PackageDescription="SOIC Narrow, 4.9 x 3.9 x 1.45mm, 8 Lead, 1.27mm Pitch", PackageReference=D0008A, PinCount=8, RoHS=Y

## Via types
v1: diameter 1.27, hole 0.711, Top Layer to Bottom Layer, 106 vias

## Nets (pads, with @x,y where several pads share a name; then routed paths per layer and width w, separated by ;. In a path a pad name is that pad's centre, name@x,y a point inside that pad or via, vN(x,y) a via of type N, cw(c..) or ccw(c..) an arc to the next point about the centre after c; other vN are vias at no path point)
+5: Q1.3 SW1.1 SW2.1 SW4.1 SW5.1 SW6.1 | length 87.7
  Top Layer w0.254: SW1.1 0.889,1.194 v1(2.591,1.194) ; SW2.1 6.682,2.438 7.442,2.438 7.95,2.946 11.913,2.946 12.319,2.54 ; v1(10.947,3.607) 11.684,3.607 12.319,2.972 ; SW4.1 12.319,2.54 ; SW5.1 18.034,2.642 ; v1(20.549,4.318) 19.05,4.318 18.034,3.302 ; SW6.1 23.7,2.631 22.419,3.912 19.304,3.912 18.034,2.642 ; v1(25.959,4.318) 28.626,6.985 33.325,6.985 38.481,1.829 41.03,1.829 42.672,3.471 42.672,6.569 41.935,7.306 41.935,16.764 42.189,17.018 43.977,17.018 45.374,15.621 Q1.3 ; 12.319,2.54 12.319,2.972 ; 12.319,2.972 12.319,3.302 13.945,4.928 17.805,4.928 18.034,4.699 18.034,3.302 ; 18.034,2.642 18.034,3.302
  Bottom Layer w0.254: v1(2.591,1.194) 3.277,0.508 9.982,0.508 10.947,1.473 v1(10.947,3.607) ; v1(20.549,4.318) v1(25.959,4.318)
+9_ASG1: C19.2 R21.1 R23.1 SW5.2 U6.4 U6.8 | length 169.5
  Top Layer w0.254: v1(19.736,2.896) 21.082,2.896 SW5.2 ; v1(39.751,20.549) 40.937,21.735 R21.1 R21.1@40.672,22.901 ; v1(39.751,21.59) 39.776,21.615 39.776,22.901 R21.1@40.672,22.901 ; U6.8 U6.8@53.797,19.057 ; R23.1 54.102,15.074 53.797,15.379 U6.8@53.797,19.057 ; v1(56.109,22.479) 57.321,22.479 ; U6.4 57.709,22.867 57.321,22.479 ; C19.2 65.659,23.312 65.659,57.387 44.976,57.404 40.157,52.585 40.157,29.972 39.649,29.464 39.649,23.924 R21.1@40.672,22.901 ; U6.8@53.797,19.057 53.899,19.057 57.321,22.479
  Bottom Layer w0.254: v1(19.736,2.896) 26.848,2.896 28.346,4.394 34.232,4.394 42.164,12.326 42.164,16.982 41.112,18.034 ; v1(39.751,21.59) v1(39.751,20.549) 39.751,19.395 ; v1(56.109,22.479) 51.664,18.034 41.112,18.034 ; 39.751,19.395 41.112,18.034 ; 39.751,19.395 39.751,18.72 40.437,18.034 41.112,18.034
+9_ASG2: C9.2 R6.1 R25.1 SW4.2 U5.4 U5.8 | length 170.8
  Top Layer w0.254: R6.1 9.761,22.675 v1(10.643,21.793) ; SW4.2 15.719,2.841 v1(16.789,3.912) ; v1(36.424,13.36) 42.115,19.052 v1(42.443,19.052) ; v1(41.427,4.902) 41.427,18.036 v1(42.443,19.052) ; U5.4 v1(42.443,19.052) ; U5.8 50.089,22.862 v1(50.089,24.105) ; C9.2 50.532,12.192 50.218,9.528 49.581,8.89 49.581,2.083 50.8,0.864 54.458,0.864 55.372,1.778 55.372,3.099 54.178,4.293 54.178,5.105 57.679,8.606 59.436,8.606 60.145,9.315 ; v1(59.004,7.112) 60.145,8.253 60.145,9.315 ; R25.1 60.145,9.315
  Bottom Layer w0.254: v1(10.643,21.793) 10.643,22.301 9.652,23.292 9.652,25.73 16.645,32.723 44.849,32.723 50.089,27.483 v1(50.089,24.105) 45.949,19.964 43.356,19.964 v1(42.443,19.052) ; v1(16.789,3.912) 19.304,6.426 30.658,6.426 31.75,7.518 31.75,11.582 33.528,13.36 v1(36.424,13.36) ; v1(41.427,4.902) 47.284,4.902 49.494,7.112 v1(59.004,7.112)
+9_ASG3: C7.2 R5.1 R16.1 SW6.2 U3.4 U3.8 | length 123.6
  Top Layer w0.254: R5.1 6.114,18.194 5.842,18.466 3.454,18.466 3.454,14.097 12.116,5.436 21.946,5.436 25.273,2.108 27.1,2.108 SW6.2 ; R16.1 21.005,24.181 21.022,24.198 U3.4 23.317,25.728 23.876,26.287 23.876,28.7 24.714,29.538 U3.8 28.27,29.208 v1(28.27,24.816) ; v1(32.979,5.461) 29.169,1.651 SW6.2 ; C7.2 46.074,2.586 44.758,1.27 27.1,1.27 SW6.2
  Bottom Layer w0.254: v1(28.27,24.816) 32.029,21.057 36.47,21.057 41.656,15.871 41.656,12.834 34.283,5.461 v1(32.979,5.461)
+9_ASG4: C13.2 R3.1 R28.1 SW1.2 U2.4 U2.8 | length 166.5
  Top Layer w0.254: R3.1 2.642,21.615 1.33,20.304 1.33,10.922 2.154,10.546 3.785,8.915 3.785,6.502 4.289,5.998 4.289,2.841 ; SW1.2 4.289,2.841 ; v1(9.271,4.547) 5.994,4.547 4.289,2.841 ; U2.4 U2.4@12.7,25.728 ; v1(13.868,26.492) 13.464,26.492 U2.4@12.7,25.728 ; v1(16.586,22.911) 16.586,24.636 15.494,25.728 U2.4@12.7,25.728 ; U2.8 v1(17.814,30.734) ; v1(53.899,1.905) 53.391,1.397 51.486,1.397 51.105,1.778 51.105,2.946 51.854,3.695 52.311,3.695 53.162,4.546 53.162,7.442 54.579,8.86 54.579,10.795 54.99,11.206 C13.2 ; v1(58.496,1.829) v1(58.572,1.905) 59.588,2.921 65.024,2.921 66.192,4.089 66.192,11.1 64.008,11.1 63.653,10.745 R28.1
  Bottom Layer w0.254: v1(13.868,26.492) 13.868,26.848 17.755,30.734 v1(17.814,30.734) ; v1(16.586,22.911) 15.75,22.911 12.289,19.449 12.289,13.914 9.195,10.82 9.195,4.623 v1(9.271,4.547) 9.271,7.366 10.414,8.509 15.24,8.509 15.773,7.976 15.773,6.452 14.249,4.928 14.249,2.261 15.392,1.118 57.785,1.118 v1(58.496,1.829) ; v1(53.899,1.905) v1(58.572,1.905)
+9_ASG5: C17.2 R4.1 R11.1 SW2.2 U4.4 U4.8 | length 226
  Top Layer w0.254: v1@2.24,11.755 v1(2.362,11.877) v1@2.606,12.12 ; R4.1 v1@2.606,12.12 ; v1(4.877,7.518) 4.877,9.362 2.606,11.633 v1@2.606,12.12 ; v1(8.458,1.93) 10.082,1.93 SW2.2 ; 13.665,24.511 13.716,24.46 14.539,24.46 15.047,23.952 R11.1 ; U4.4 30.959,25.728 ; v1(31.467,26.236) 30.959,25.728 ; U4.8 34.642,29.538 31.458,26.245 30.959,25.728 ; C17.2 59.448,13.411 59.182,13.677 59.182,17.678 59.436,17.932 v1(61.62,17.932)
  Bottom Layer w0.254: v1@2.24,11.755 1.016,12.979 1.016,36.297 1.845,37.126 5.588,37.126 6.036,37.574 6.036,48.886 14.935,57.785 57.683,57.785 61.62,53.848 v1(61.62,17.932) ; v1(2.362,11.877) 2.362,19.38 3.759,20.777 11.354,20.777 11.659,21.082 11.659,22.454 10.16,23.952 10.16,24.968 10.668,25.476 12.7,25.476 13.665,24.511 19.406,30.251 27.452,30.251 v1(31.467,26.236) ; v1(4.877,7.518) 4.877,5.512 v1(8.458,1.93)
GND: BT1.1 C1.1 C1.2 C3.2 C4.2 C5.2 C6.2 C7.1 C8.2 C9.1 C10.2 C11.2 C12.2 C13.1 C14.2 C15.2 C16.2 C17.1 C18.2 C19.1 D1.1 D2.1 D3.1 D4.1 D5.1 D6.1 LS1.N Q1.2 R2.1 R9.2 R24.2 U1.3 U1.4 U2.1 U3.1 U4.1 U5.1 U6.1 | length 300.8
  Top Layer w0.254: R2.1 1.016,34.071 1.016,24.972 2.032,23.956 4.162,23.956 4.162,21.387 2.656,19.881 C1.1 C1.2 D1.1 6.96,19.196 v1(6.96,15.621) ; U1.4 U1.3 5.994,27.024 ; D2.1 11.655,18.409 R9.2 11.655,16.1 v1(10.744,15.189) ; v1(11.354,30.759) 11.354,29.538 11.43,29.538 U2.1 ; D3.1 14.973,18.999 17.295,18.999 D4.1 18.881,18.999 21.203,18.999 D5.1 22.789,18.999 24.333,18.999 24.333,20.345 25.853,21.866 28.038,21.866 C3.2 28.038,23.241 28.956,23.774 29.464,24.282 31.246,24.131 v1@31.546,24.106 ; v1(20.447,31.572) 20.117,31.242 20.117,29.538 U3.1 ; U4.1 U4.1@29.896,29.538 ; v1(30.378,31.572) 30.378,30.021 ; v1(31.267,24.384) v1@31.546,24.106 ; C4.2 v1@31.546,24.106 ; v1(32.36,35.027) 29.896,32.563 U4.1@29.896,29.538 ; v1(35.054,24.384) C5.2 35.306,23.622 37.617,25.933 37.617,33.884 36.627,34.874 35.232,34.874 ; Q1.2 43.474,14.324 43.474,13.462 ; v1(43.84,27.356) 44.676,26.52 LS1.N@47.269,26.52 ; U5.1 44.981,22.862 46.253,21.59 46.253,16.478 D6.1 ; C6.2 45.249,11.241 45.009,11.481 43.474,11.481 C7.1 43.474,13.462 ; C8.2 47.498,10.5 47.932,10.934 47.932,11.352 ; LS1.N LS1.N@47.269,26.52 ; C10.2 49.58,10.72 49.276,11.024 48.26,11.024 47.932,11.352 ; C11.2 51.76,10.998 52.39,11.628 ; C12.2 51.308,16.674 51.21,16.576 51.21,14.478 51.794,13.894 52.07,13.894 52.39,13.574 ; BT1.1 52.282,67.767 42.539,58.025 41.539,58.025 36.932,53.418 36.932,36.574 35.232,34.874 ; C14.2 53.941,10.474 53.594,10.82 53,10.82 52.39,11.43 52.39,11.628 ; C15.2 56.121,10.449 56.848,11.176 C17.1 56.848,13.367 ; R24.2 58.344,10.233 58.344,13.087 58.096,13.335 58.096,13.97 ; C18.2 62.854,17.323 63.858,17.323 64.898,18.363 C19.1 63.856,20.712 63.511,21.057 60.96,21.057 60.63,20.726 60.63,19.26 60.427,19.057 U6.1 58.657,17.388 58.096,16.827 C16.2 58.096,13.97 ; U4.1@29.896,29.538 30.378,30.021 ; 30.378,30.021 35.232,34.874 ; 43.474,13.462 43.753,13.741 45.824,13.741 D6.1 ; LS1.N@47.269,26.52 47.269,23.653 47.981,22.941 47.981,18.11 48.209,17.882 48.209,15.324 D6.1 ; D6.1 47.932,14.799 47.932,13.462 ; 47.932,11.352 C9.1 47.932,13.462 ; 47.932,13.462 48.192,13.722 52.13,13.722 52.39,13.462 ; 52.39,11.628 C13.1 52.39,13.462 ; 52.39,13.462 52.39,13.574 ; 52.39,13.574 52.39,13.64 52.472,13.722 56.588,13.722 56.848,13.462 56.848,13.367 ; 56.848,13.367 57.493,13.367 58.096,13.97
  Bottom Layer w0.254: R2.1 2.54,34.595 6.375,30.759 v1(11.354,30.759) 16.358,35.763 20.142,35.763 20.879,35.027 v1(32.36,35.027) ; v1(6.96,15.621) 10.312,15.621 v1(10.744,15.189) ; v1(20.447,31.572) v1(30.378,31.572) ; v1(35.054,24.384) v1(31.267,24.384) 33.018,26.134 42.619,26.134 v1(43.84,27.356)
NetBT1_2: BT1.2 SW3.2 | length 75.2
  Top Layer w0.254: SW3.2 v1(15.24,38.583)
  Bottom Layer w0.254: v1(15.24,38.583) 13.259,38.583 9.22,34.544 7.188,34.544 6.544,35.188 6.544,46.625 16.332,56.413 52.299,56.413 BT1.2
NetC2_ASG1_1: C12.1 U6.5 | length 27.3
  Top Layer w0.254: C12.1 52.527,15.174 53.458,14.243 55.372,14.243 55.728,14.598 55.728,17.297 56.134,17.704 57.633,17.704 v1(57.633,17.831) ; U6.5 52.984,22.867 52.984,25.756 53.848,26.619 v1(58.674,26.619)
  Bottom Layer w0.254: v1(57.633,17.831) 59.004,19.202 59.004,26.289 v1(58.674,26.619)
NetC2_ASG2_1: C5.1 U5.5 | length 23.3
  Top Layer w0.254: C5.1 33.554,22.098 33.808,21.844 35.662,21.844 37.16,23.343 v1(37.16,24.028) ; v1(48.492,24.028) 48.492,19.328 48.768,19.052 U5.5
  Bottom Layer w0.254: v1(37.16,24.028) v1(48.492,24.028)
NetC2_ASG3_1: C3.1 U3.5 | length 2.9
  Top Layer w0.254: C3.1 26.538,24.257 26.672,24.391 U3.5
NetC2_ASG4_1: C16.1 U2.5 | length 109.7
  Top Layer w0.254: U2.5 18.771,25.728 19.101,26.058 19.101,32.548 21.793,35.24 v1(21.793,36.5) ; C16.1 56.596,15.184 v1(57.074,14.707)
  Bottom Layer w0.254: v1(21.793,36.5) 19.101,39.192 19.101,53.086 19.456,53.442 20.955,53.442 21.387,53.01 53.696,53.01 60.282,46.423 60.282,17.915 v1(57.074,14.707)
NetC2_ASG5_1: C4.1 U4.5 | length 9.5
  Top Layer w0.254: C4.1 30.046,22.098 30.3,21.844 32.156,21.844 32.41,22.098 32.41,24.638 33.501,25.728 U4.5
NetC3_ASG1_1: C8.1 R14.2 R23.2 U6.2 U6.6 | length 87.3
  Top Layer w0.254: R14.2 20.651,18.009 21.133,18.491 23.368,18.491 24.536,17.323 24.536,11.659 25.476,10.719 35.937,10.719 38.782,7.874 v1(39.903,7.874) ; C8.1 47.498,9.743 47.752,9.489 v1(47.752,8.839) ; U6.6 53.848,21.597 54.229,21.978 54.229,22.606 55.956,24.333 v1(57.988,24.333) ; R23.2 54.688,18.237 v1(57.099,20.327) U6.2
  Bottom Layer w0.254: v1(39.903,7.874) 40.411,7.366 46.279,7.366 v1(47.752,8.839) ; v1(57.099,20.327) 47.752,10.98 v1(47.752,8.839) ; v1(57.988,24.333) 57.988,21.209 56.617,19.837 56.617,17.704 v1(47.752,8.839)
NetC3_ASG2_1: C11.1 R10.2 R25.2 U5.2 U5.6 | length 147.2
  Top Layer w0.254: R10.2 13.843,17.189 15.367,15.665 v1(15.367,11.074) ; v1(38.176,17.526) 42.242,21.592 U5.2 ; C11.1 51.003,9.464 50.343,8.804 50.343,5.334 51.232,4.445 52.273,4.445 52.654,4.826 v1(52.654,8.458) ; v1(61.845,6.96) v1(61.845,7.624) v1(61.845,8.458) R25.2
  Bottom Layer w0.254: v1(15.367,11.074) 16.281,10.16 16.281,5.182 15.748,4.648 15.748,2.362 16.256,1.854 19.304,1.854 ; v1(38.176,17.526) 39.116,16.586 39.116,12.903 38.608,12.395 37.135,12.395 33.985,9.246 33.985,8.306 31.471,5.791 20.041,5.791 18.72,4.47 18.72,2.438 19.304,1.854 ; v1(52.654,8.458) v1(61.845,8.458) ; v1(61.845,6.96) 62.509,6.295 ; v1(61.845,7.624) 62.509,6.96 62.509,6.295 ; 19.304,1.854 48.006,1.854 ; 48.006,1.854 49.86,1.854 51.714,3.708 ; 48.006,1.854 49.86,3.708 51.714,3.708 ; 51.714,3.708 60.472,3.587 ; 51.714,3.708 60.35,3.708 60.472,3.587 ; 60.472,3.587 60.858,3.581 ; 60.472,3.587 60.477,3.581 60.858,3.581 ; 60.858,3.581 61.976,3.581 62.509,4.115 62.509,6.295
NetC3_ASG3_1: C10.1 R5.2 R13.2 U3.2 U3.6 | length 113.1
  Top Layer w0.254: R5.2 7.814,17.411 8.103,17.411 8.103,12.903 8.636,12.37 11.078,12.37 13.741,9.707 13.741,6.35 14.122,5.969 16.51,5.969 17.907,7.366 17.907,10.516 20.091,12.7 20.091,14.462 ; R13.2 17.399,17.694 17.399,17.154 20.091,14.462 ; U3.2 19.652,27.94 19.652,21.547 20.193,21.006 21.692,21.006 22.276,21.59 22.276,23.622 24.869,26.085 25.83,26.998 ; v1(22.784,17.475) 24.025,16.234 24.025,14.297 23.698,13.97 20.583,13.97 20.091,14.462 ; v1(24.892,26.06) 25.83,26.998 ; U3.6 25.83,26.998 ; v1(39.421,2.87) 34.773,7.518 21.844,7.518 20.117,9.246 20.091,14.462 ; v1(47.092,3.353) 48.823,5.084 C10.1
  Bottom Layer w0.254: v1(22.784,17.475) 22.784,23.952 v1(24.892,26.06) ; v1(39.421,2.87) 46.609,2.87 v1(47.092,3.353)
NetC3_ASG4_1: C14.1 R7.2 R28.2 U2.2 U2.6 | length 203.6
  Top Layer w0.254: R7.2 9.897,18.694 8.941,19.65 8.941,20.066 8.28,20.726 6.045,20.726 5.182,21.59 5.182,23.876 5.436,24.13 9.042,24.13 10.389,25.476 10.389,27.762 10.895,28.268 U2.2 14.134,28.268 15.404,26.998 16.764,26.998 ; U2.6 16.764,26.998 ; v1(51.638,5.588) 51.13,6.096 51.13,8.45 52.863,10.183 C14.1 ; v1(55.702,4.724) 56.845,3.581 58.776,3.581 ; R28.2 65.353,6.425 62.509,3.581 58.776,3.581 ; 16.764,26.998 16.207,27.555 16.207,33.327 16.967,34.087 19.05,34.087 19.471,34.508 19.471,35.651 21.666,37.846 25.959,37.846 26.213,38.1 26.213,45.237 49.907,68.931 54.813,68.931 54.813,65.964 62.408,58.369 66.345,58.369 67.335,57.379 67.335,2.286 65.862,0.813 57.912,0.813 57.48,1.245 57.48,2.286 58.776,3.581
  Bottom Layer w0.254: v1(51.638,5.588) 52.501,4.724 v1(55.702,4.724)
NetC3_ASG5_1: C15.1 R4.2 R12.2 U4.2 U4.6 | length 261.5
  Top Layer w0.254: R4.2 4.306,14.262 6.706,11.862 10.269,11.862 12.624,9.507 v1(12.624,7.493) ; v1(14.757,7.493) 17.399,10.135 17.399,14.478 16.383,15.494 16.383,16.256 15.171,17.468 R12.2 ; U4.2 31.008,28.268 34.516,31.775 36.784,31.775 37.084,31.475 37.084,27.506 36.576,26.998 U4.6 34.089,26.998 v1(33.858,27.229) ; v1(42.418,28.854) 42.418,43.79 52.324,53.696 54.407,53.696 54.813,54.102 54.813,54.788 55.372,55.347 v1(64.414,55.347) ; v1(52.375,2.667) 53.67,3.962 53.67,6.087 55.364,7.781 C15.1
  Bottom Layer w0.254: v1(12.624,7.493) v1(14.757,7.493) 13.741,6.477 13.741,0.938 14.117,0.562 58.806,0.562 60.022,1.778 60.022,2.335 59.436,2.921 ; v1(33.858,27.229) 35.484,28.854 v1(42.418,28.854) ; v1(52.375,2.667) 52.629,2.921 59.436,2.921 ; v1(64.414,55.347) 63.221,56.54 63.221,69.342 64.541,70.663 66.396,70.663 66.954,70.104 66.954,4.851 65.024,2.921 59.436,2.921
NetC5_1: C18.1 U1.7 | length 143.7
  Top Layer w0.254: U1.7 9.906,28.268 10.338,28.7 10.338,31.242 10.871,31.775 11.759,31.775 11.911,31.623 13.741,31.623 21.59,39.472 21.59,51.13 40.869,70.409 60.655,70.409 v1(64.44,66.624) ; C18.1 60.054,14.977 v1(60.287,14.745)
  Bottom Layer w0.254: v1(60.287,14.745) 61.544,16.002 63.096,16.002 63.858,15.24 66.192,15.24 66.446,15.494 66.446,64.618 v1(64.44,66.624)
NetC6_1: C2.1 LS1.P | length 29.2
  Top Layer w0.254: C2.1 24.765,35.535 v1(28.575,39.345) ; v1(43.434,43.02) LS1.P
  Bottom Layer w0.254: v1(28.575,39.345) 39.759,39.345 v1(43.434,43.02)
NetC6_2: C2.2 R24.1 U1.5 | length 240.7
  Top Layer w0.254: U1.5 6.96,25.728 6.655,26.033 6.655,45.339 35.382,74.066 63.754,74.066 65.964,71.857 65.964,65.761 65.532,65.329 61.697,65.329 57.48,69.545 55.626,69.545 ; C2.2 24.765,48.616 45.695,69.545 ; R24.1 57.524,9.906 58.109,9.322 58.928,9.322 59.233,9.627 59.233,10.922 59.512,11.201 60.427,11.201 60.427,13.284 60.706,13.564 63.109,13.564 65.43,15.885 v1(65.43,16.256) ; v1(65.43,59.741) 55.626,69.545 ; 45.695,69.545 55.626,69.545 ; 45.695,69.546 55.626,69.546
  Bottom Layer w0.254: v1(65.43,16.256) v1(65.43,59.741)
NetD1_ASG1_2: D6.2 R21.2 | length 13.7
  Top Layer w0.254: R21.2 44.164,26.001 47.407,22.758 D6.2
NetD1_ASG2_2: D1.2 R6.2 | length 20.5
  Top Layer w0.254: D1.2 8.712,18.944 8.712,14.591 8.611,14.49 8.611,13.411 9.144,12.878 11.781,12.878 12.167,13.264 12.167,18.059 12.573,18.466 12.573,22.044 12.189,22.428 R6.2
NetD1_ASG3_2: D5.2 R16.2 | length 3.1
  Top Layer w0.254: D5.2 23.496,20.904 24.105,21.513 R16.2
NetD1_ASG4_2: D2.2 R3.2 | length 7.3
  Top Layer w0.254: R3.2 6.231,21.76 6.742,21.249 9.433,21.249 9.904,20.777 10.787,20.777 D2.2
NetD1_ASG5_2: D4.2 R11.2 | length 3.5
  Top Layer w0.254: R11.2 18.147,21.233 D4.2
NetD2_2: D3.2 R26.1 | length 120.2
  Top Layer w0.254: D3.2 v1(16.612,20.724) ; v1(22.86,28.931) 24.587,30.658 26.213,30.658 31.23,35.675 31.23,48.807 v1(50.292,67.869) ; R26.1 62.865,19.712 v1(63.552,19.025)
  Bottom Layer w0.254: v1(16.612,20.724) 17.272,20.724 18.11,21.562 18.11,24.181 v1(22.86,28.931) ; v1(50.292,67.869) 63.766,54.395 63.766,19.24 v1(63.552,19.025)
NetR1_ASG1_1: R20.1 R20.2 R22.1 U6.3 | length 76.1
  Top Layer w0.254: R20.2 37.719,6.731 38.1,6.731 R20.1 ; R22.1 49.765,15.67 50.038,15.943 50.546,15.943 50.546,17.018 51.791,18.263 51.791,26.594 53.848,28.651 58.928,28.651 59.868,27.711 59.868,21.597 ; U6.3 59.868,21.597 ; v1(62.408,14.58) 62.992,14.58 64.262,15.85 64.262,16.967 65.888,18.593 65.888,19.545 66.129,19.787 66.129,21.692 60.35,21.692 60.256,21.597 59.868,21.597
  Bottom Layer w0.254: R20.1 39.827,6.35 39.903,6.426 46.838,6.426 52.019,11.608 59.436,11.608 v1(62.408,14.58)
NetR1_ASG1_2: R2.3 R17.2 R19.2 R22.2 R27.2 R29.2 | length 226.1
  Top Layer w0.254: R17.2 26.954,19.253 27.244,18.963 30.121,18.963 v1@30.462,19.304 ; v1(30.462,18.72) v1@30.462,19.304 ; R19.2 v1@30.462,19.304 ; v1(34.9,18.72) 39.091,22.911 39.091,29.717 39.649,30.275 v1(39.649,54.407) ; R22.2 49.765,17.253 51.105,18.593 51.105,49.149 v1@55.601,53.645 ; R27.2 63.619,12.616 63.957,12.954 63.957,13.397 66.489,13.397 ; R29.2 66.489,13.397 ; v1@55.601,53.645 64.643,44.602 64.643,25.121 63.652,24.13 63.652,22.377 66.613,22.377 66.637,22.353 66.637,19.257 66.489,19.109 66.489,13.397 ; v1@55.601,53.645 55.347,53.899 v1(55.855,53.899) v1@55.601,53.645
  Bottom Layer w0.254: R2.3 7.62,45.695 15.875,53.95 ; v1(30.462,18.72) v1(34.9,18.72) ; v1(39.649,54.407) 16.332,54.407 15.875,53.95 ; v1(55.855,53.899) 39.649,53.899 21.641,53.899 21.59,53.95 15.875,53.95
NetR1_ASG2_1: R8.1 R8.2 R17.1 U5.3 | length 52.4
  Top Layer w0.254: R17.1 25.254,13.43 v1(25.654,13.03) 27.28,11.405 28.88,11.405 29.413,11.938 29.413,12.802 32.614,16.002 32.614,16.51 33.274,17.17 36.472,17.17 37.154,16.489 38.731,16.489 39.26,17.018 42.191,20.322 U5.3
  Bottom Layer w0.254: R8.1 10.16,10.312 10.912,10.312 R8.2 13.208,12.608 13.208,14.884 14.224,15.9 19.152,15.9 22.047,13.005 25.629,13.005 v1(25.654,13.03)
NetR1_ASG3_1: R18.1 R18.2 R27.1 U3.3 | length 91.2
  Top Layer w0.254: U3.3 v1(22.86,26.998) ; v1(33.63,16.027) 33.63,15.25 R18.2 35.957,12.1 37.592,10.465 38.989,10.465 40.919,8.534 40.919,6.833 39.7,5.613 v1(39.7,4.902) ; R27.1 61.011,12.616 61.011,9.779 60.757,9.525 60.757,6.35 61.352,5.755 62.266,5.755 63.551,7.04 v1(63.551,7.518)
  Bottom Layer w0.254: v1(22.86,26.998) 20.923,25.061 20.923,17.457 22.352,16.027 v1(33.63,16.027) ; R18.1 29.118,8.382 29.464,8.382 30.48,9.398 R18.2 ; v1(39.7,4.902) 40.716,5.918 47.295,5.918 51.41,10.033 61.976,10.033 63.551,8.458 v1(63.551,7.518)
NetR1_ASG4_1: R1.1 R1.2 R19.1 U2.3 | length 89.7
  Top Layer w0.254: v1(11.176,24.46) 10.897,24.74 10.897,26.719 11.176,26.998 U2.3 ; v1(27.356,14.046) 31.496,18.186 31.496,20.371 31.242,20.625 29.067,20.625 28.762,20.32 R19.1
  Bottom Layer w0.254: R1.1 2.27,8.56 7.137,8.56 7.976,9.398 7.976,10.368 11.781,14.173 11.781,17.124 10.274,18.631 ; R1.2 3.81,16.205 ; v1(11.176,24.46) 12.167,23.47 12.167,20.574 11.781,20.188 7.793,20.188 5.563,17.958 ; v1(27.356,14.046) 24.638,14.046 24.121,13.529 22.31,13.529 15.596,20.244 15.596,21.336 16,21.74 17.283,21.74 17.602,22.06 17.602,23.622 17.297,23.927 15.57,23.927 10.274,18.631 ; 3.81,16.205 3.81,16.51 5.258,17.958 5.563,17.958 ; 3.81,16.205 5.563,17.958 ; 5.563,17.958 9.601,17.958 10.274,18.631
NetR1_ASG5_1: R15.1 R15.2 R29.1 U4.3 | length 111.8
  Top Layer w0.254: R15.1 25.552,3.023 v1(28.778,3.023) ; v1(28.296,12.497) 32.106,16.307 32.106,18.364 33.528,19.787 34.95,19.787 38.227,23.063 38.227,30.886 v1(38.633,31.293) ; U4.3 30.478,26.998 34.239,30.759 v1(35.585,30.759) ; v1(61.493,4.597) 62.738,4.597 64.567,6.426 64.567,8.382 63.424,9.525 62.814,9.525 62.814,11.125 63.5,11.811 64.262,11.811 64.783,12.616 R29.1
  Bottom Layer w0.254: R15.1 19.05,10.431 17.399,12.082 17.399,13.97 18.078,14.649 19.006,14.649 R15.2 22.511,12.007 26.67,12.007 27.16,12.497 v1(28.296,12.497) ; v1(28.778,3.023) 29.642,3.886 46.152,3.886 46.634,4.369 48.641,4.369 50.876,6.604 55.804,6.604 56.794,5.613 60.477,5.613 v1(61.493,4.597) ; v1(35.585,30.759) 36.119,31.293 v1(38.633,31.293)
NetR4_ASG1_1: R14.1 R20.3 | length 23.5
  Top Layer w0.254: R14.1 20.284,17.409 v1(22.682,15.011) ; R20.3 v1(38.1,13.487)
  Bottom Layer w0.254: v1(22.682,15.011) 22.835,15.164 27.965,15.164 28.118,15.011 36.576,15.011 v1(38.1,13.487)
NetR4_ASG2_1: R8.3 R10.1 | length 9.1
  Top Layer w0.254: R10.1 12.813,16.016 v1(14.351,14.478)
  Bottom Layer w0.254: v1(14.351,14.478) 14.351,10.449 R8.3
NetR4_ASG3_1: R13.1 R18.3 | length 22
  Top Layer w0.254: R13.1 16.329,17.326 16.891,16.764 16.891,15.989 18.567,14.313 v1(18.567,13.462) ; v1(26.365,9.398) 27.164,8.599 32.059,8.599 R18.3
  Bottom Layer w0.254: v1(18.567,13.462) 21.539,10.49 25.273,10.49 v1(26.365,9.398)
NetR4_ASG4_1: R1.3 R7.1 | length 9.6
  Top Layer w0.254: R7.1 9.297,14.224 v1(9.627,13.894)
  Bottom Layer w0.254: R1.3 9.627,12.837 v1(9.627,13.894)
NetR4_ASG5_1: R12.1 R15.3 | length 18.3
  Top Layer w0.254: R12.1 14.571,17.179 15.875,15.875 15.875,14.275 v1(16.383,13.767)
  Bottom Layer w0.254: v1(16.383,13.767) 16.383,12.183 18.034,10.532 18.034,8.382 19.251,7.165 21.77,7.165 R15.3
NetR7_2: R2.2 R9.1 U1.2 | length 58.4
  Top Layer w0.254: U1.2 4.316,28.268 5.08,29.032 R2.2 ; v1(10.541,16.713) 11.055,17.227 R9.1
  Bottom Layer w0.254: R2.2 1.813,38.135 0.508,36.83 0.508,10.643 0.533,10.617 4.064,10.617 5.782,12.335 5.782,16.002 6.493,16.713 v1(10.541,16.713)
VCC: C6.1 Q1.1 R26.2 SW3.1 U1.6 | length 222.8
  Top Layer w0.254: U1.6 8.052,26.998 7.576,27.474 7.576,31.157 9.144,32.725 SW3.1 12.74,45.049 ; v1(20.117,52.426) 12.74,45.049 ; v1(27.381,64.084) 12.74,49.443 12.74,45.049 ; C6.1 C6.1@43.349,10.033 ; Q1.1 43.374,15.494 43.018,15.138 42.52,15.138 42.52,10.414 42.901,10.033 C6.1@43.349,10.033 ; v1(44.704,8.534) 44.196,8.534 43.349,9.381 C6.1@43.349,10.033 ; R26.2 62.636,22.812 v1(62.636,24.181)
  Bottom Layer w0.254: v1(20.117,52.426) 50.8,52.426 51.816,51.41 51.816,28.466 57.404,22.878 57.404,22.167 44.704,9.467 v1(44.704,8.534) ; v1(27.381,64.084) 52.4,64.084 62.992,53.492 62.992,24.536 v1(62.636,24.181)
pads on no net: BT1. LS1.S1 LS1.S2 SW3. SW3.3 U1.1 U1.8 U2.7 U3.7 U4.7 U5.7 U6.7

## Silkscreen, mask and mechanical layers (free items; w line width, h text height)
Top Overlay:
  text "Kleinertone" at 6.35,77.47 h2